# Altium PCB MODEM2.PcbDoc
Units mm, origin at the board's own origin, x right, y up, seen from the top; angles counter-clockwise.
Board outline 63 x 45 mm, 2 copper layers (Top Layer, Bottom Layer); 72 components, 71 nets, 297 pads, 90 vias.
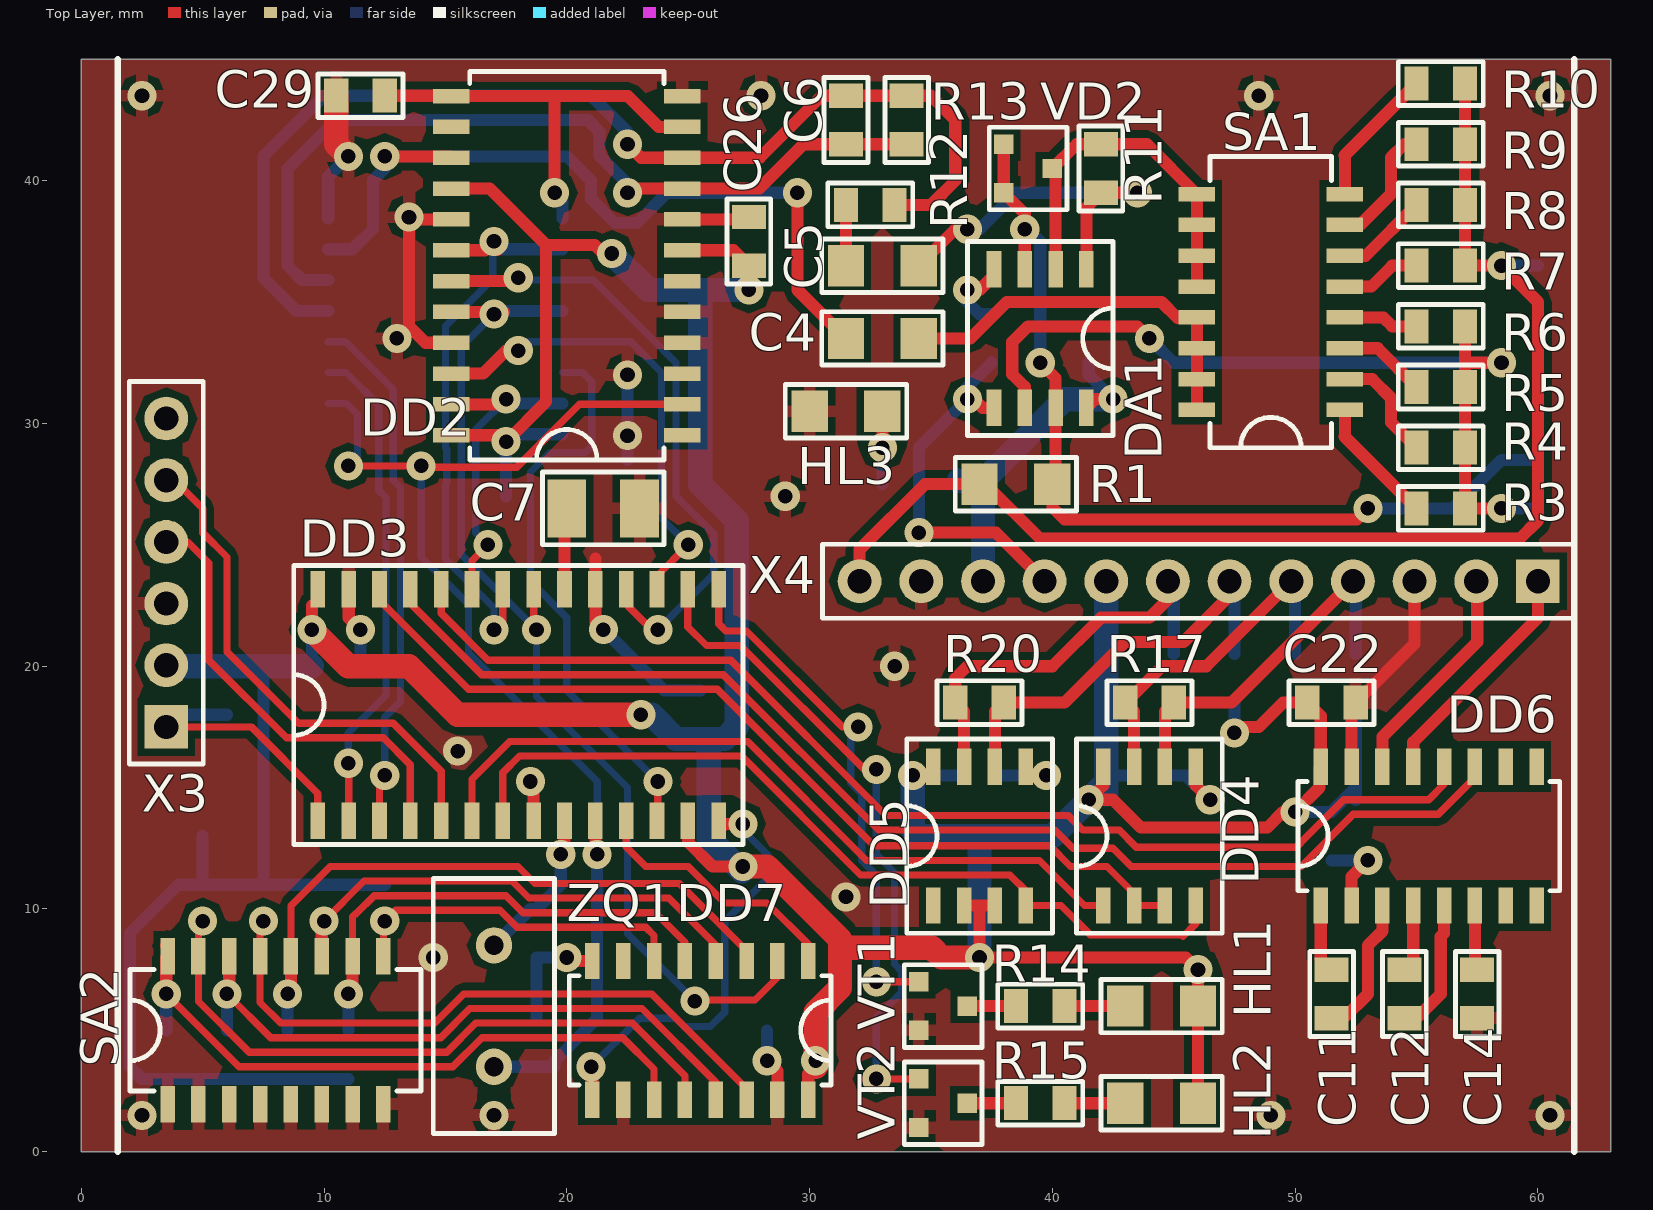
[diagram p0: Top Layer view]
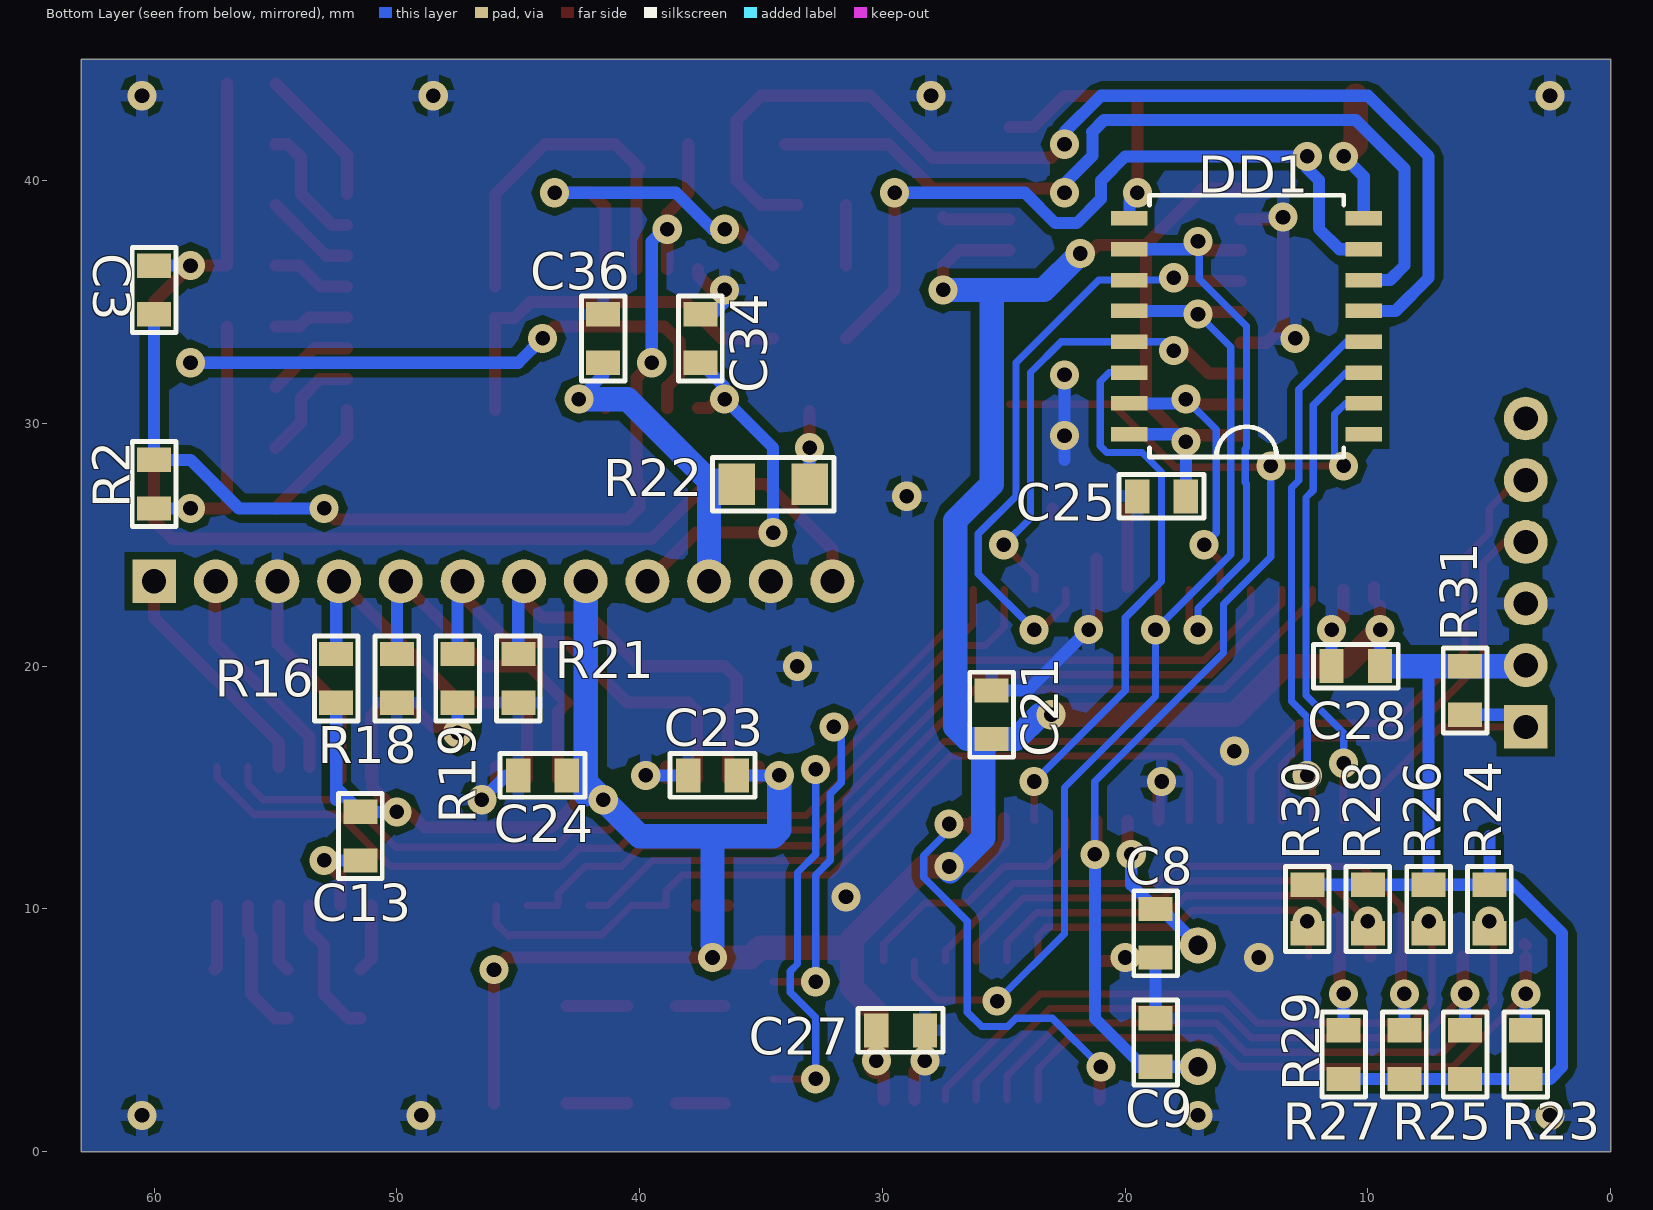
[diagram p1: Bottom Layer view, seen from below]

## Layer stack, top to bottom
Top Solder: solder mask 0.0102, Solder Resist, Dk 3.5
Top Layer: signal copper 0.0356
Dielectric 1: dielectric 0.32, FR-4, Dk 4.8
Bottom Layer: signal copper 0.0356
Bottom Solder: solder mask 0.0102, Solder Resist, Dk 3.5

## Board outline
0,0 0,45 63,45 63,0

## Design rules (kind name [scope] priority, off if disabled: settings)
Clearance [All] p1: gap=0.3
PolygonConnect [All] p1: connectstyle=Relief reliefconductorwidth=0.5 reliefentries=4 polygonreliefangle="90 Angle" airgapwidth=0.3
RoutingCorners [All] p1: cornerstyle=45-Degree minsetback=2.5 maxsetback=2.5
RoutingVias [All] p1: holewidth=0.6 width=1.2 viastyle="Through Hole" minholewidth=0.6 minwidth=1.2 maxholewidth=0.6 maxwidth=1.2
SolderMaskExpansion [All] p1: expansion=0.102
Width [All] p1: maxlimit=1 minlimit=0.3 preferedwidth=0.5
29 further rules are at their usual default settings.

## Components (designator, comment, footprint, x,y, rotation, side; value= is the part's Value field where it differs from the comment)
C3 "0.15uF" CC0805 60,35.5 r270 bottom
C4 "1.5uF" CC1206 33,33.5 r180 top
C5 "1.5uF" CC1206 33,36.5 r180 top
C6 "100pF" CC0805 31.5,42.5 r270 top
C7 "10uF" SMB 23.25,26.5 r180 top
C8 "20pF" CC0805 18.75,9 r90 bottom
C9 "20pF" CC0805 18.75,4.5 r270 bottom
C11 "0.1uF" CC0805 51.5,6.5 r270 top
C12 "0.1uF" CC0805 54.5,6.5 r270 top
C13 "0.1uF" CC0805 51.5,13 r270 bottom
C14 "0.1uF" CC0805 57.5,6.5 r90 top
C21 "0.1uF" CC0805 25.5,18 r270 bottom
C22 "0.1uF" CC0805 51.5,18.5 r180 top
C23 "0.1uF" CC0805 37,15.5 r180 bottom
C24 "0.1uF" CC0805 44,15.5 r180 bottom
C25 "0.1uF" CC0805 18.5,27 r180 bottom
C26 "0.1uF" CC0805 27.5,37.5 r270 top
C27 "0.1uF" CC0805 29.25,5 r0 bottom
C28 "0.1uF" CC0805 10.5,20 r180 bottom
C29 "0.1uF" CC0805 11.5,43.5 r0 top
C34 "0.1uF" CC0805 37.5,33.5 r270 bottom
C36 "0.1uF" CC0805 41.5,33.5 r270 bottom
DA1 "LM258DT" LM258DT 39.5,33.5 r270 top
DD1 "FX604D4" FX604D4 15,34 r0 bottom
DD2 "CMX868D2" CMX868D2 20,36.5 r180 top
DD3 "PIC24HJ128GP502" PIC24HJ128GP502 18,18.4 r90 top
DD4 "ST3485" SP3485 44,13 r90 top
DD5 "ST3485" SP3485 37,13 r90 top
DD6 "ST3232BDR" ST3232BDR 55.5,13 r90 top
DD7 "SN74HC165D" SN74HC165D 25.5,5 r270 top
HL1 "KP-3216EC" KP-3216EC 44.5,6 r180 top
HL2 "KP-3216EC" KP-3216EC 44.5,2 r180 top
HL3 "KP-3216EC" KP-3216EC 31.5,30.5 r180 top
R1 "200" RC1206 38.5,27.5 r180 top
R2 "27K" RC0805 60,27.5 r270 bottom
R3 "47.5K" RC0805 56,26.5 r180 top
R4 "24K" RC0805 56,29 r180 top
R5 "12K" RC0805 56,31.5 r180 top
R6 "6.04K" RC0805 56,34 r180 top
R7 "47.5K" RC0805 56,36.5 r180 top
R8 "24K" RC0805 56,39 r180 top
R9 "12K" RC0805 56,41.5 r180 top
R10 "6.04K" RC0805 56,44 r180 top
R11 "47K" RC0805 42,40.5 r270 top
R12 "150K" RC0805 32.5,39 r0 top
R13 "100K" RC0805 34,42.5 r270 top
R14 "180" RC0805 39.5,6 r0 top
R15 "180" RC0805 39.5,2 r0 top
R16 "560" RC0805 52.5,19.5 r90 bottom
R17 "120" RC0805 44,18.5 r180 top
R18 "560" RC0805 50,19.5 r270 bottom
R19 "560" RC0805 47.5,19.5 r90 bottom
R20 "120" RC0805 37,18.5 r180 top
R21 "560" RC0805 45,19.5 r270 bottom
R22 "1.5K" RC1206 34.5,27.5 r0 bottom
R23 "47K" RC0805 3.5,4 r90 bottom
R24 "47K" RC0805 5,10 r270 bottom
R25 "47K" RC0805 6,4 r90 bottom
R26 "47K" RC0805 7.5,10 r270 bottom
R27 "47K" RC0805 8.5,4 r270 bottom
R28 "47K" RC0805 10,10 r90 bottom
R29 "47K" RC0805 11,4 r270 bottom
R30 "47K" RC0805 12.5,10 r90 bottom
R31 "47K" RC0805 6,19 r90 bottom
SA1 "DHN-08F-V" DHN-08F-V 49,35 r180 top
SA2 "DHN-08F-V" DHN-08F-V 8,5 r90 top
VD2 "BAV199" BAV199 39,40.5 r270 top
VT1 "BCR135" BCR135 35.5,6 r270 top
VT2 "BCR135" BCR135 35.5,2 r270 top
X3 "PLS-06" PLS-06 3.5,17.5 r90 top
X4 "PLS-12" PLS-12 60,23.5 r180 top
ZQ1 "3.58M" HC-49/S 17,8.5 r270 top

## Footprints (in the part's own frame and the unit in brackets; to place one, negate y for a bottom-side part, rotate by r counter-clockwise, add the part's x,y. Pads: shape width x height; smd on the part's side, far side on the other; paste and mask are expansions set on the pad)
BAV199 [mm]
  rect 0.8x0.8 smd: 1(-1,-1) 2(1,-1) 3(0,1)
  silkscreen extent -1.7,-1.6 1.7,1.6
BCR135 [mm]
  rect 0.8x0.8 smd: 1(-1,-1) 2(1,-1) 3(0,1)
  silkscreen extent -1.7,-1.6 1.7,1.6
CC0805 [mm]
  rect 1x1.4 smd: 1(-1,0) 2(1,0)
  silkscreen extent -1.75,-0.9 1.75,0.9
CC1206 [mm]
  rect 1.5x1.7 smd: 1(-1.5,0) 2(1.5,0)
  silkscreen extent -2.5,-1.1 2.5,1.1
CMX868D2 [mm]
  rect 1.5x0.6 smd: 1(-4.763,6.985) 2(-4.763,5.715) 3(-4.763,4.445) 4(-4.763,3.175) 5(-4.763,1.905) 6(-4.763,0.635) 7(-4.763,-0.635) 8(-4.763,-1.905) 9(-4.762,-3.175) 10(-4.762,-4.445) 11(-4.762,-5.715) 12(-4.762,-6.985) 13(4.763,-6.985) 14(4.763,-5.715) 15(4.763,-4.445) 16(4.763,-3.175) 17(4.763,-1.905) 18(4.763,-0.635) 19(4.763,0.635) 20(4.763,1.905) 21(4.762,3.175) 22(4.762,4.445) 23(4.762,5.715) 24(4.762,6.985)
  silkscreen extent -4,-8 4,8
DHN-08F-V [mm]
  rect 1.5x0.6 smd: 1(-3.048,4.445) 2(-3.048,3.175) 3(-3.048,1.905) 4(-3.048,0.635) 5(-3.048,-0.635) 6(-3.048,-1.905) 7(-3.048,-3.175) 8(-3.048,-4.445) 9(3.048,-4.445) 10(3.048,-3.175) 11(3.048,-1.905) 12(3.048,-0.635) 13(3.048,0.635) 14(3.048,1.905) 15(3.048,3.175) 16(3.048,4.445)
  silkscreen extent -2.5,-6 2.5,6
FX604D4 [mm]
  rect 1.5x0.6 smd: 1(-4.826,4.445) 2(-4.826,3.175) 3(-4.826,1.905) 4(-4.826,0.635) 5(-4.826,-0.635) 6(-4.826,-1.905) 7(-4.826,-3.175) 8(-4.826,-4.445) 9(4.826,-4.445) 10(4.826,-3.175) 11(4.826,-1.905) 12(4.826,-0.635) 13(4.826,0.635) 14(4.826,1.905) 15(4.826,3.175) 16(4.826,4.445)
  silkscreen extent -4,-5.4 4,5.39
HC-49/S [mm]
  round 1.5 hole 0.8: 1(0,0) 2(5,0)
  silkscreen extent -2.75,-2.5 7.75,2.5
KP-3216EC [mm]
  rect 1.5x1.7 smd: 1(-1.5,0) 2(1.5,0)
  silkscreen extent -2.5,-1.1 2.5,1.1
LM258DT [mm]
  rect 1.5x0.6 smd: 1(-2.858,1.905) 2(-2.857,0.635) 3(-2.857,-0.635) 4(-2.857,-1.905) 5(2.858,-1.905) 6(2.857,-0.635) 7(2.857,0.635) 8(2.857,1.905)
  silkscreen extent -4,-3 4,3
PIC24HJ128GP502 [mm]
  rect 1.5x0.6 smd: 1(-4.763,8.255) 2(-4.763,6.985) 3(-4.763,5.715) 4(-4.763,4.445) 5(-4.763,3.175) 6(-4.763,1.905) 7(-4.763,0.635) 8(-4.763,-0.635) 9(-4.763,-1.905) 10(-4.763,-3.175) 11(-4.763,-4.445) 12(-4.763,-5.715) 13(-4.762,-6.985) 14(-4.762,-8.255) 15(4.763,-8.255) 16(4.763,-6.985) 17(4.763,-5.715) 18(4.763,-4.445) 19(4.763,-3.175) 20(4.763,-1.905) 21(4.763,-0.635) 22(4.763,0.635) 23(4.763,1.905) 24(4.763,3.175) 25(4.763,4.445) 26(4.763,5.715) 27(4.762,6.985) 28(4.762,8.255)
  silkscreen extent -5.75,-9.25 5.75,9.25
PLS-06 [mm]
  rect 1.8x1.8 hole 1: 1(0,0)
  round 1.8 hole 1: 2(2.54,0) 3(5.08,0) 4(7.62,0) 5(10.16,0) 6(12.7,0)
  silkscreen extent -1.52,-1.52 14.22,1.52
PLS-12 [mm]
  rect 1.8x1.8 hole 1: 1(0,0)
  round 1.8 hole 1: 2(2.54,0) 3(5.08,0) 4(7.62,0) 5(10.16,0) 6(12.7,0) 7(15.24,0) 8(17.78,0) 9(20.32,0) 10(22.86,0) 11(25.4,0) 12(27.94,0)
  silkscreen extent -1.52,-1.52 29.46,1.52
RC0805 [mm]
  rect 1x1.4 smd: 1(-1,0) 2(1,0)
  silkscreen extent -1.75,-0.9 1.75,0.9
RC1206 [mm]
  rect 1.5x1.7 smd: 1(-1.5,0) 2(1.5,0)
  silkscreen extent -2.5,-1.1 2.5,1.1
SMB [mm]
  rect 1.6x2.4 smd: 1(0.25,0) 2(3.25,0)
  silkscreen extent -0.75,-1.5 4.25,1.5
SN74HC165D [mm]
  rect 1.5x0.6 smd: 1(-2.858,4.445) 2(-2.858,3.175) 3(-2.858,1.905) 4(-2.857,0.635) 5(-2.857,-0.635) 6(-2.857,-1.905) 7(-2.857,-3.175) 8(-2.857,-4.445) 9(2.858,-4.445) 10(2.858,-3.175) 11(2.858,-1.905) 12(2.857,-0.635) 13(2.857,0.635) 14(2.857,1.905) 15(2.857,3.175) 16(2.857,4.445)
  silkscreen extent -2.25,-5.4 2.25,5.39
SP3485 [mm]
  rect 1.5x0.6 smd: 1(-2.857,1.905) 2(-2.857,0.635) 3(-2.857,-0.635) 4(-2.857,-1.905) 5(2.857,-1.905) 6(2.857,-0.635) 7(2.857,0.635) 8(2.857,1.905)
  silkscreen extent -4,-3 4,3
ST3232BDR [mm]
  rect 1.5x0.6 smd: 1(-2.858,4.445) 2(-2.858,3.175) 3(-2.857,1.905) 4(-2.857,0.635) 5(-2.857,-0.635) 6(-2.857,-1.905) 7(-2.857,-3.175) 8(-2.857,-4.445) 9(2.858,-4.445) 10(2.858,-3.175) 11(2.857,-1.905) 12(2.857,-0.635) 13(2.857,0.635) 14(2.857,1.905) 15(2.857,3.175) 16(2.857,4.445)
  silkscreen extent -2.25,-5.4 2.25,5.39

## Part data
C3 C4 C5 C6 C8 C9 C11 C12 C13 C14 C21 C22 C23 C24 C25 C26 C27 C28 C29 C34 C36: library part CC1206
C7: library part SR-6
DD4 DD5: library part SP3485
DD6: library part SP3232
HL1 HL2 HL3: library part KP-3216EC_L
R1: library part RC1206
R2 R3 R4 R5 R6 R7 R8 R9 R10 R11 R12 R13 R14 R15 R16 R17 R18 R19 R20 R21 R22 R23 R24 R25 R26 R27 R28 R29 R30 R31: library part RC0805
ZQ1: library part ZQ

## Via types
v1: diameter 1.2, hole 0.6, Top Layer to Bottom Layer, 90 vias

## Nets (pads, with @x,y where several pads share a name; then routed paths per layer and width w, separated by ;. In a path a pad name is that pad's centre, name@x,y a point inside that pad or via, vN(x,y) a via of type N, cw(c..) or ccw(c..) an arc to the next point about the centre after c; other vN are vias at no path point)
+3.3V: C13.1 C21.2 C22.2 C23.2 C24.2 C25.2 C26.2 C27.2 C28.2 DD1.16 DD2.7 DD2.16 DD2.24 DD3.13 DD3.28 DD4.8 DD5.2 DD5.3 DD5.8 DD6.16 DD7.16 HL1.1 HL2.1 R16.1 R19.1 R23.1 R24.1 R25.1 R26.1 R27.2 R28.2 R29.2 R30.2 R31.2 X3.2 X4.8 | length 222.6
  Top Layer w0.5: v1(9.5,21.5) DD3.28@9.5,22.5 ; DD3.28@9.745,22.745 DD3.28@9.745,23.262 ; DD2.24 17.235,29.515 v1(17.5,29.25) 19.15,30.9 19.15,37.35 ; DD2.16 16.825,39.675 19.15,37.35 ; v1(21.85,37) 21.5,37 21.15,37.35 19.15,37.35 ; DD2.7 26.865,37.135 C26.2 v1(27.5,35.5) ; DD3.13@24.985,13.737 DD3.13 25,13.623 25,12.75 26,11.75 v1(27.25,11.75) ; DD7.16 29.945,3.195 v1@30.25,3.5 ; v1(34.25,15.5) 35,15.5 35.095,15.405 DD5.8 ; DD5.2 37,10.142 ; v1(37,8) 45.5,8 v1(46,7.5) HL1.1 HL2.1 ; v1@37,8.5 37,10.142 ; DD5.3 37,10.142 ; DD4.8 42.095,15.095 v1(41.5,14.5) 42.5,14.5 43.65,13.35 48.85,13.35 49.5,14 v1(50,14) 51,15 51,15.803 DD6.16 ; v1(47.5,17.25) 47.5,17.5 48.5,17.5 49.5,18.5 C22.2 51.055,17.945 DD6.16@51.055,15.358
  Top Layer w1: v1(9.5,21.5) 11,20 13.5,20 15.5,18 v1(23.05,18) ; v1(27.25,11.75) 28.25,11.75 31.25,8.75 31.25,8.4 ; v1@30.25,3.5 v1(30.25,3.75) 30.25,5.75 31.25,6.75 31.25,8.4 ; v1(37,8) 35.431,8 35.031,8.4 31.25,8.4
  Bottom Layer w0.5: 5,13 R24.1 ; 7.5,20 R26.1 ; C28.2@9.5,20.5 v1(9.5,21.5) ; R29.2 R27.2 R25.1 R23.1 2.5,3 2,3.5 2,9 4,11 R24.1 ; R30.2 R28.2 R26.1 ; C25.2 v1(17.5,29.25) 17.5,29.5 17.555,29.555 DD1.16 ; v1(34.25,15.5) C23.2 ; 42.22,15.22 42.5,15.5 C24.2 ; v1(47.5,17.25) R19.1 ; v1(50,14) C13.1 52.5,15 ; 52.5,14.5 R16.1 ; R24.1 R26.1
  Bottom Layer w1: X3.2 3.54,20 7.5,20 C28.2 ; v1(21.85,37) 23.35,35.5 v1(27.5,35.5) 25.5,35.5 25.5,27.5 27,26 27,17.5 26.5,17 C21.2 ; v1(23.05,18) 23.5,18 24.5,17 C21.2 ; v1(27.25,11.75) 27.25,11.593 27.213,11.557 25.85,12.92 25.85,16.65 C21.2 ; v1(34.25,15.5) 34.25,13.25 34.5,13 37,13 ; v1@37,8.5 37,13 ; 42.22,14.72 X4.8 ; 42.22,15.22 v1(41.5,14.5) 40,13 37,13
+8V: C34.2 DA1.5 X4.9 | length 15.9
  Top Layer w0.5: v1(34.5,25.5) 37.68,25.5 X4.9 ; v1(36.5,31) 36.5,31.263 37.12,30.642 DA1.5
  Bottom Layer w0.5: v1(34.5,25.5) 34.5,29 v1(36.5,31) 36.5,31.5 C34.2
+15V: C36.2 DA1.8 R22.2 X4.10 | length 15.2
  Top Layer w0.5: DA1.8 41.762,31 v1(42.5,31)
  Bottom Layer w0.5: X4.10@37,23.36 X4.10 ; C36.2 41.5,32 v1(42.5,31)
  Bottom Layer w1: R22.2@36.14,27.64 37.14,27.64 ; X4.10 37.14,27.64 ; v1(42.5,31) 40.5,31 37.14,27.64
\SS: DD1.10 DD2.18 DD3.22 | length 24.8
  Top Layer w0.3: v1(17,21.5) 17.365,21.865 DD3.22
  Top Layer w0.5: DD2.18 16.635,37.135 v1(17,37.5) 17,37.3 v1@17.15,37.15
  Bottom Layer w0.3: v1(17,21.5) 17,22.401 15,24.401 15,27.515 15.05,27.565 15.05,28.935 15,28.985 15,34 16.95,35.95 16.95,37.45 v1(17,37.5)
  Bottom Layer w0.5: v1(17,37.5) 17.325,37.175 DD1.10
A: DD4.6 R16.2 R17.1 X4.4 | length 15.8
  Top Layer w0.5: DD4.6@44.635,15.358 44.635,18.135 R17.1 47.38,18.5 X4.4
  Bottom Layer w0.5: X4.4 52.5,23.38 R16.2
ADRES: DD3.14 DD7.9 | length 18.5
  Top Layer w0.5: v1(21,3.5) 21.055,3.445 DD7.9 ; DD3.14 26.255,13.255 26.5,13.5 v1(27.25,13.5)
  Bottom Layer w0.3: v1(21,3.5) 23,5.5 24.5,5.5 24.842,5.158 25.907,5.158 26.5,5.75 26.5,9.5 28.3,11.3 28.3,12.2 27.25,13.25 v1(27.25,13.5)
B: DD4.7 R17.2 R18.1 X4.5 | length 15.3
  Top Layer w0.5: DD4.7@43.365,15.358 43.365,18.135 R17.2 43,18.478 44.522,20 46.34,20 X4.5
  Bottom Layer w0.5: X4.5 50,23.34 R18.1
C1+: C11.1 DD6.1 | length 2.8
  Top Layer w0.5: DD6.1 51.055,7.945 C11.1
C1-: C11.2 DD6.3 | length 5.8
  Top Layer w0.5: C11.2 52,5.5 53,6.5 53,8.5 53.595,9.095 DD6.3
C2+: C12.1 DD6.4 | length 2.8
  Top Layer w0.5: C12.1 54.865,7.865 DD6.4
C2-: C12.2 DD6.5 | length 5.6
  Top Layer w0.5: C12.2 55,5.5 56,6.5 56,8.865 56.135,9 DD6.5
DET: DD1.14 DD3.12 | length 23.5
  Top Layer w0.3: DD3.12 23.75,13.672 v1(23.75,15.25)
  Bottom Layer w0.3: DD1.14 20.655,32.095 21.026,31.724 21.026,30.041 21.026,29.069 20.762,28.805 19.305,28.805 18.5,28 18.5,23.5 20,22 20,19 v1(23.75,15.25)
GND: C7.1 C8.1 C9.1 C14.1 C21.1 C22.1 C23.1 C24.1 C25.1 C26.1 C27.1 C28.1 C29.1 C34.1 C36.1 DA1.4 DD1.8 DD2.4 DD2.5 DD2.8 DD2.12 DD2.17 DD2.21 DD3.8 DD3.19 DD3.27 DD4.5 DD5.5 DD6.15 DD7.8 DD7.10 DD7.15 HL3.2 R18.2 R21.2 SA2.1 SA2.2 SA2.3 SA2.4 SA2.5 SA2.6 SA2.7 SA2.8 VT1.2 VT2.2 X3.3 X4.3 X4.11 | length 60.1
  Top Layer w0.5: DD3.27 11.015,21.985 v1(11.5,21.5) ; DD2.21 14.175,33.325 13.5,34 v1(13.5,38.5) 13.595,38.405 DD2.17 ; v1(18.5,15.25) 18.635,15.115 DD3.8 ; v1(20,8) 20.142,7.858 DD7.8 ; 21.175,24.425 DD3.19 21.175,21.825 21.5,21.5 v1(21.509,21.509) ; C7.1@23,26.25 C7.1 ; DD2.8 27.405,38.405 C26.1 ; v1(28.25,3.75) 28.675,3.325 DD7.15 ; v1(36.5,35.5) 37,35.5 37.595,36.095 DA1.4 ; DD5.5 38.905,15.405 39,15.5 v1(39.75,15.5) ; DD4.5 45.905,15.095 v1(46.5,14.5) ; DD6.15@52.325,15.358 52.325,18.325 C22.1 54.92,20.92 X4.3
  Top Layer w1: C29.1 10.5,41.5 v1(11,41)
  Bottom Layer w0.5: DD1.8 10.174,40.174 v1(11,41) ; C28.1@11.5,20.5 v1(11.5,21.5) ; C9.1 C8.1 v1(20,8) ; v1(21.509,21.509) 24.018,19 C21.1 ; 22.5,28.5 v1(22.5,32) ; v1(28.25,3.75) C27.1 ; v1(36.5,35.5) 36.5,35 37,34.5 C34.1 ; C23.1 v1(39.75,15.5) ; C24.1 45.5,15.5 v1(46.5,14.5)
  other v1: 2.5,1.5 17,1.5 49,1.5 60.5,1.5 14.5,8 31.5,10.5 15.5,16.5 33.5,20 29,27 22.5,29.5 13,33.5 2.5,43.5 28,43.5 48.5,43.5 60.5,43.5
HL1: DD3.15 VT1.1 | length 21.7
  Top Layer w0.3: DD3.15 26.255,21.745 26.55,21.45 27.399,21.45 31.349,17.5 v1(32,17.5) ; v1(32.75,7) VT1.1
  Bottom Layer w0.3: v1(32,17.5) 31.7,17.2 31.7,15.2 32.15,14.75 32.15,12.001 32.75,11.401 v1(32.75,7)
HL2: DD3.16 VT2.1 | length 27.1
  Top Layer w0.3: DD3.16 24.985,21.615 25.75,20.85 27.15,20.85 32.25,15.75 v1(32.75,15.75) ; v1(32.75,3) VT2.1
  Bottom Layer w0.3: v1(32.75,3) 32.75,5.515 33.8,6.565 33.8,7.435 33.5,7.735 33.5,11.5 32.75,12.25 v1(32.75,15.75)
IN-OUT: C3.1 R1.2 R7.1 R8.1 R9.1 R10.1 X4.12 | length 53.2
  Top Layer w0.5: X4.12 32.06,24.81 34.75,27.5 37.25,27.5 39.5,25.25 59.25,25.25 60,26 60,35 v1(58.5,36.5) R7.1 R8.1 R9.1 R10.1
  Bottom Layer w0.5: v1(58.5,36.5) C3.1
LOAD: DD3.11 DD7.1 | length 10.9
  Top Layer w0.3: DD3.11 22.445,12.555 23.25,11.75 25,11.75 26.5,10.25 28.25,10.25 29.945,8.555 DD7.1
M0: DD1.3 DD3.2 | length 20.5
  Top Layer w0.3: v1(11,16) 11.015,15.985 DD3.2
  Bottom Layer w0.3: DD1.3 10.905,32.095 12.25,30.75 12.25,27.25 12.55,26.95 12.55,18.8 11,17.25 v1(11,16)
M1: DD1.4 DD3.3 | length 21.7
  Top Layer w0.3: DD3.3 12.285,15.285 v1(12.5,15.5)
  Bottom Layer w0.3: DD1.4 10.885,33.365 12.85,31.4 12.85,27.65 13.15,27.35 13.15,18.551 12.5,17.901 v1(12.5,15.5)
MCLR: DD3.1 R31.1 X3.1 | length 11.2
  Top Layer w0.3: X3.1 7,17.5 9.745,14.755 DD3.1
  Bottom Layer w0.5: X3.1 4,18 R31.1
MISO: DD1.13 DD2.22 DD3.17 | length 19.7
  Top Layer w0.3: DD3.17 23.715,23.715 v1(25,25)
  Top Layer w0.5: DD2.22 16.555,32.055 17.5,33 v1(18,33)
  Bottom Layer w0.3: v1(18,33) 18.365,33.365 DD1.13 22.635,33.365 23.9,32.1 23.9,26.1 v1(25,25)
MOSI: DD1.11 DD2.19 DD3.18 | length 26.1
  Top Layer w0.3: DD3.18 22.445,22.555 23.75,21.25 v1(23.75,21.5)
  Top Layer w0.5: DD2.19 17.865,35.865 v1(18,36)
  Bottom Layer w0.3: v1(18,36) 18.095,35.905 DD1.11 21.095,35.905 24.25,32.75 24.5,32.5 24.5,27 26.05,25.45 26.05,23.8 v1(23.75,21.5)
NetC3_2: C3.2 DA1.3 DA1.7 R1.1 R2.1 VD2.1 VD2.2 | length 44.8
  Top Layer w0.5: VD2.1 VD2.2 38.865,38.635 v1(38.865,38) DA1.3 ; v1(39.5,32.5) 40.135,31.865 DA1.7 40.135,27.635 R1.1 40,26.55 40.5,26.05 52.55,26.05 v1(53,26.5)
  Bottom Layer w0.5: v1(38.865,38) 39,38 39.5,37.5 v1(39.5,32.5) ; v1(53,26.5) 56.5,26.5 58.5,28.5 R2.1 C3.2
NetC4_1: C4.1 SA1.13 SA1.14 SA1.15 SA1.16 | length 16.2
  Top Layer w0.5: C4.1 36.622,33.5 38.122,35 44.5,35 45.15,34.35 45.937,34.35 SA1.13 SA1.14 SA1.15 SA1.16
NetC5_1: C5.1 DA1.1 R11.2 | length 15.1
  Top Layer w0.5: C5.1 36,38 v1(36.5,38) ; DA1.1 41.405,38.905 R11.2 v1(43.5,39.5)
  Bottom Layer w0.5: v1(36.5,38) 37,38 38.5,39.5 v1(43.5,39.5)
NetC7_2: C7.2 DD3.20 | length 3.3
  Top Layer w0.5: DD3.20@19.905,23.262 19.905,26.405 C7.2
NetDA1_2: DA1.2 R11.1 SA1.9 SA1.10 SA1.11 SA1.12 VD2.3 | length 15.2
  Top Layer w0.5: DA1.2 40.135,40.365 VD2.3 41,41.5 R11.1 43.897,41.5 SA1.9 SA1.10 SA1.11 SA1.12
NetDA1_6: DA1.6 R2.2 R3.1 R4.1 R5.1 R6.1 | length 36
  Top Layer w0.5: DA1.6 38.865,31.509 38.35,32.024 38.35,33.35 39,34 43.5,34 v1(44,33.5) ; R6.1 57,32.5 ; v1(58.5,26.5) R3.1 R4.1 R5.1 57,32.5 ; v1(58.5,32.5) 57,32.5
  Bottom Layer w0.5: v1(44,33.5) 45,32.5 v1(58.5,32.5) ; v1(58.5,26.5) R2.2
NetDD7_3: DD7.3 R27.1 SA2.12 | length 26.5
  Top Layer w0.3: SA2.12 8.635,10.135 10.25,11.75 17.993,11.75 18.693,11.05 24.629,11.05 27.405,8.274 DD7.3
  Top Layer w0.5: v1(8.5,6.5) 8.635,6.635 SA2.12
  Bottom Layer w0.5: R27.1 v1(8.5,6.5)
NetDD7_4: DD7.4 R28.1 SA2.11 | length 20.1
  Top Layer w0.3: v1@9.905,9.405 v1(10,9.5) 11.65,11.15 17.744,11.15 18.444,10.45 24.201,10.45 26.135,8.516 DD7.4
  Top Layer w0.5: SA2.11 v1@9.905,9.405
NetDD7_5: DD7.5 R29.1 SA2.10 | length 20.4
  Top Layer w0.3: SA2.10 11.175,9.675 11.3,9.8 11.315,9.8 12.065,10.55 17.496,10.55 18.196,9.85 23.65,9.85 24.865,8.635 DD7.5
  Top Layer w0.5: v1(11,6.5) 11.175,6.675 SA2.10
  Bottom Layer w0.5: R29.1 v1(11,6.5)
NetDD7_6: DD7.6 R30.1 SA2.9 | length 14.2
  Top Layer w0.3: SA2.9 12.445,9.445 v1(12.5,9.5) 12.95,9.95 17.247,9.95 17.947,9.25 23.25,9.25 23.595,8.905 DD7.6
NetDD7_11: DD7.11 R23.2 SA2.16 | length 26.7
  Top Layer w0.3: v1(3.5,6.5) 6.5,3.5 15.303,3.5 16.503,4.7 22.3,4.7 23.595,3.405 DD7.11
  Top Layer w0.5: v1(3.5,6.5) SA2.16@3.5,7.993 ; SA2.16@3.5,8.493 SA2.16@3.555,8.548
  Bottom Layer w0.5: R23.2 v1(3.5,6.5)
NetDD7_12: DD7.12 R24.2 SA2.15 | length 26.7
  Top Layer w0.3: v1(5,9.5) 4.825,9.325 SA2.15 4.825,6.19 6.915,4.1 15.054,4.1 16.254,5.3 22.7,5.3 24.865,3.135 DD7.12
NetDD7_13: DD7.13 R25.2 SA2.14 | length 26.4
  Top Layer w0.3: v1(6,6.5) 7.8,4.7 14.806,4.7 16.006,5.9 23.1,5.9 26.135,2.865 DD7.13
  Top Layer w0.5: v1(6,6.5) 6.095,6.595 SA2.14
  Bottom Layer w0.5: R25.2 v1(6,6.5)
NetDD7_14: DD7.14 R26.2 SA2.13 | length 26.4
  Top Layer w0.3: v1(7.5,9.5) 7.365,9.365 SA2.13 7.365,6.15 8.215,5.3 14.557,5.3 15.757,6.5 23.5,6.5 27.405,2.595 DD7.14
NetHL1_2: HL1.2 R14.2 | length 2.5
  Top Layer w0.5: R14.2 HL1.2
NetHL2_2: HL2.2 R15.2 | length 2.5
  Top Layer w0.5: R15.2 HL2.2
NetHL3_1: HL3.1 R22.1 | length 3
  Top Layer w0.5: v1(33,29) HL3.1
  Bottom Layer w0.5: R22.1 v1(33,29)
NetR3_2: R3.2 SA1.1 | length 5.4
  Top Layer w0.5: SA1.1@52.048,30.452 SA1.1 52.048,29.452 52.036,29.464 54.012,27.488 R3.2
NetR4_2: R4.2 SA1.2 | length 4.7
  Top Layer w0.5: SA1.2 53.175,31.825 53.95,31.05 53.95,30.05 R4.2
NetR5_2: R5.2 SA1.3 | length 3.6
  Top Layer w0.5: SA1.3 53.405,33.095 R5.2
NetR6_2: R6.2 SA1.4 | length 3.1
  Top Layer w0.5: SA1.4 53.635,34.365 54,34 R6.2
NetR7_2: R7.2 SA1.5 | length 3.3
  Top Layer w0.5: SA1.5 53.135,35.635 54,36.5 R7.2
NetR8_2: R8.2 SA1.6 | length 3.8
  Top Layer w0.5: SA1.6 52.905,36.905 R8.2
NetR9_2: R9.2 SA1.7 | length 5.2
  Top Layer w0.5: SA1.7 52.675,38.175 53.95,39.45 53.95,40.95 54.5,41.5 R9.2
NetR10_2: R10.2 SA1.8 | length 6.4
  Top Layer w0.5: 52.048,40.048 SA1.8 52.048,41.048 52.036,41.036 54.012,43.012 R10.2
NetR14_1: R14.1 VT1.3 | length 2
  Top Layer w0.5: VT1.3 R14.1
NetR15_1: R15.1 VT2.3 | length 2
  Top Layer w0.5: VT2.3 R15.1
OSC1: C8.2 DD3.9 ZQ1.1 | length 7
  Top Layer w0.5: v1(19.75,12.25) 19.75,12 19.905,12.155 DD3.9
  Bottom Layer w0.5: ZQ1.1 18.5,10 C8.2 19.75,11 v1(19.75,12.25)
OSC2: C9.2 DD1.2 DD2.2 DD3.10 ZQ1.2 | length 51.2
  Top Layer w0.3: v1(11,28.25) v1@13.95,28.25 ; v1@14,28.2 17.935,28.2 20.52,30.785 DD2.2
  Top Layer w0.5: DD3.10 21.175,12.575 21.5,12.25 v1(21.25,12.25)
  Bottom Layer w0.3: DD1.2 10.925,30.825 11.374,30.376 11.374,28.624 v1(11,28.25) ; v1(14,28.25) 14,24.5 15.95,22.55 15.95,20.55 21.25,15.25 v1(21.25,12.25)
  Bottom Layer w0.5: ZQ1.2 C9.2 19.5,3.5 19.5,3.75 21.25,5.5 v1(21.25,12.25)
PGEC1: DD3.5 X3.5 | length 21.2
  Top Layer w0.3: X3.5 3.84,27.66 5,26.5 5,25.5 6,24.5 6,20.6 8.95,17.65 12.85,17.65 14.825,15.675 DD3.5
PGED1: DD3.4 X3.4 | length 18.5
  Top Layer w0.3: X3.4 4.38,25.12 5.25,24.25 5.25,20.25 8.45,17.05 12.45,17.05 13.555,15.945 DD3.4
RDYN: DD1.15 DD2.23 DD3.23 | length 13.6
  Top Layer w0.3: DD3.23 16.095,24.345 v1(16.75,25)
  Top Layer w0.5: DD2.23 17.285,30.785 v1(17.5,31)
  Bottom Layer w0.3: v1(16.75,25) 16.25,25.5 16.25,29.75 v1(17.5,31)
  Bottom Layer w0.5: v1(17.5,31) 17.675,30.825 DD1.15
RXAN: C5.2 R12.1 | length 2.5
  Top Layer w0.5: C5.2 R12.1
RXD: DD6.13 X4.1 | length 9.8
  Top Layer w0.5: DD6.13 54.865,16.865 60,22 X4.1
RXFB: C6.2 DD1.6 DD2.9 R13.2 | length 35.1
  Top Layer w0.5: v1(22.5,39.5) 22.675,39.675 DD2.9 27.925,39.675 29.75,41.5 C6.2 R13.2
  Bottom Layer w0.5: DD1.6 9.095,35.905 8.5,36.5 8.5,40.5 10.5,42.5 20.869,42.5 21.371,41.998 21.35,41.976 21.35,41.024 22.5,39.874 v1(22.5,39.5)
RXIN: C6.1 DD1.5 DD2.10 R12.2 R13.1 | length 46
  Top Layer w0.5: v1(22.5,41.5) 23.055,40.945 DD2.10 27.945,40.945 30.5,43.5 C6.1 R13.1 35,43.5 36,42.5 36,40 35,39 R12.2
  Bottom Layer w0.5: DD1.5 8.865,34.635 7.5,36 7.5,41 10,43.5 21,43.5 22.5,42 v1(22.5,41.5)
SCLK: DD1.12 DD2.20 DD3.21 DD7.2 | length 44.2
  Top Layer w0.3: DD3.21 18.635,21.615 v1(18.75,21.5) ; v1(25.277,6.208) 25.277,6.223 25.25,6.25 27.75,6.25 28.675,7.175 DD7.2
  Top Layer w0.5: DD2.20 16.905,34.595 v1(17,34.5) 17.31,34.5 v1@17.405,34.595
  Bottom Layer w0.3: v1(17,34.5) 15.65,33.15 15.65,24.6 v1(18.75,21.5) 18.75,18.75 22.5,15 22.5,8.985 v1(25.277,6.208)
  Bottom Layer w0.5: v1(17,34.5) 17.135,34.635 DD1.12
T/R\: DD3.26 DD4.2 DD4.3 | length 38.3
  Top Layer w0.3: DD3.26 12.285,22.715 15.95,19.05 26.2,19.05 32.65,12.6 39.9,12.6 40.75,11.75 42.25,11.75 43.365,10.635 DD4.2 DD4.3
TXAN: C4.2 DD1.7 DD2.15 | length 34.1
  Top Layer w0.5: v1(12.5,41) 14,41 15.182,41 DD2.15 ; v1(29.5,39.5) 29.5,35.5 C4.2
  Bottom Layer w0.5: DD1.7 11.175,37.175 12.024,38.024 12.024,40.024 12.5,40.5 v1(12.5,41) 20,41 21,40 21,39.25 22,38.25 22.876,38.25 24.126,39.5 v1(29.5,39.5)
TXD: DD6.14 X4.2 | length 9.8
  Top Layer w0.5: DD6.14 53.595,17.095 ; DD6.14@53.595,16.595 53.595,17.095 ; X4.2 57.5,23.46 57.5,21 53.595,17.095
U1RX: DD3.6 DD4.1 | length 31.2
  Top Layer w0.3: DD3.6 16.095,15.345 17.65,16.9 27.449,16.9 32.349,12 39.47,12 41.327,10.142 DD4.1
U1TX: DD3.7 DD4.4 DD5.4 | length 35.2
  Top Layer w0.3: DD3.7 17.365,15.615 18.05,16.3 27.2,16.3 32.1,11.4 38.25,11.4 38.905,10.745 DD5.4 40.357,10.142 41.557,8.942 45.308,8.942 45.383,8.867 45.905,9.39 DD4.4
U2RX: DD3.24 DD6.12 | length 48.1
  Top Layer w0.3: DD3.24 14.825,22.175 16.75,20.25 26.75,20.25 33.15,13.85 40.65,13.85 41.25,13.25 42.75,13.25 43.454,12.546 50.046,12.546 50.442,12.942 52,14.5 55.5,14.5 56.135,15.135 DD6.12
U2TX: DD3.25 DD6.11 | length 50.9
  Top Layer w0.3: DD3.25 13.555,22.596 16.501,19.65 26.449,19.65 32.849,13.25 40.1,13.25 40.85,12.5 42.5,12.5 43.25,11.75 50.25,11.75 52.4,13.9 55.9,13.9 57.405,15.405 DD6.11
V+: C13.2 DD6.2 | length 3.6
  Top Layer w0.5: DD6.2 52.325,11.325 v1(53,12)
  Bottom Layer w0.5: C13.2 v1(53,12)
V-: C14.2 DD6.6 | length 2.7
  Top Layer w0.5: DD6.6 57.405,7.595 C14.2
VBIAS: C29.2 DD1.9 DD2.11 DD2.13 | length 18
  Top Layer w0.5: C29.2 15.222,43.5 DD2.13 19.5,43.485 ; v1(19.5,39.5) 19.5,43.485 ; DD2.11 23.785,42.215 22.515,43.485 19.5,43.485
  Bottom Layer w0.5: v1(19.5,39.5) 19.826,39.174 DD1.9
Y: DD5.6 R19.2 R20.1 X4.6 | length 18.1
  Top Layer w0.5: DD5.6@37.635,15.358 37.635,18.135 R20.1 40.5,18.5 43,21 45.4,21 47.3,22.9 X4.6
  Bottom Layer w0.5: X4.6 47.5,23.3 R19.2
Z: DD5.7 R20.2 R21.1 X4.7 | length 18.2
  Top Layer w0.5: DD5.7@36.365,15.358 36.365,18.135 R20.2 36,19.5 36.5,20 40,20 42,22 44,22 44.76,22.76 X4.7
  Bottom Layer w0.5: X4.7 45,23.26 R21.1
pads on no net: DD1.1 DD2.1 DD2.3 DD2.6 DD2.14 DD5.1 DD6.7 DD6.8 DD6.9 DD6.10 DD7.7 X3.6

## Polygon pours and split planes (outlines as drawn)
GND on Top Layer "GND" (solid, pour order 0): 0,45 63,45 63,0 0,0
GND on Bottom Layer "GND" (solid, pour order 2): 0,45 63,45 63,0 0,0

## Silkscreen, mask and mechanical layers (free items; w line width, h text height)
Top Overlay:
  lines w0.254: 1.5,0 1.5,45 ; 61.5,0 61.5,45
Mechanical 4:
  the board outline again, w0.254